# EAGLE board JdDRangeFinderNew-1 (2) (EAGLE 9.6.2)
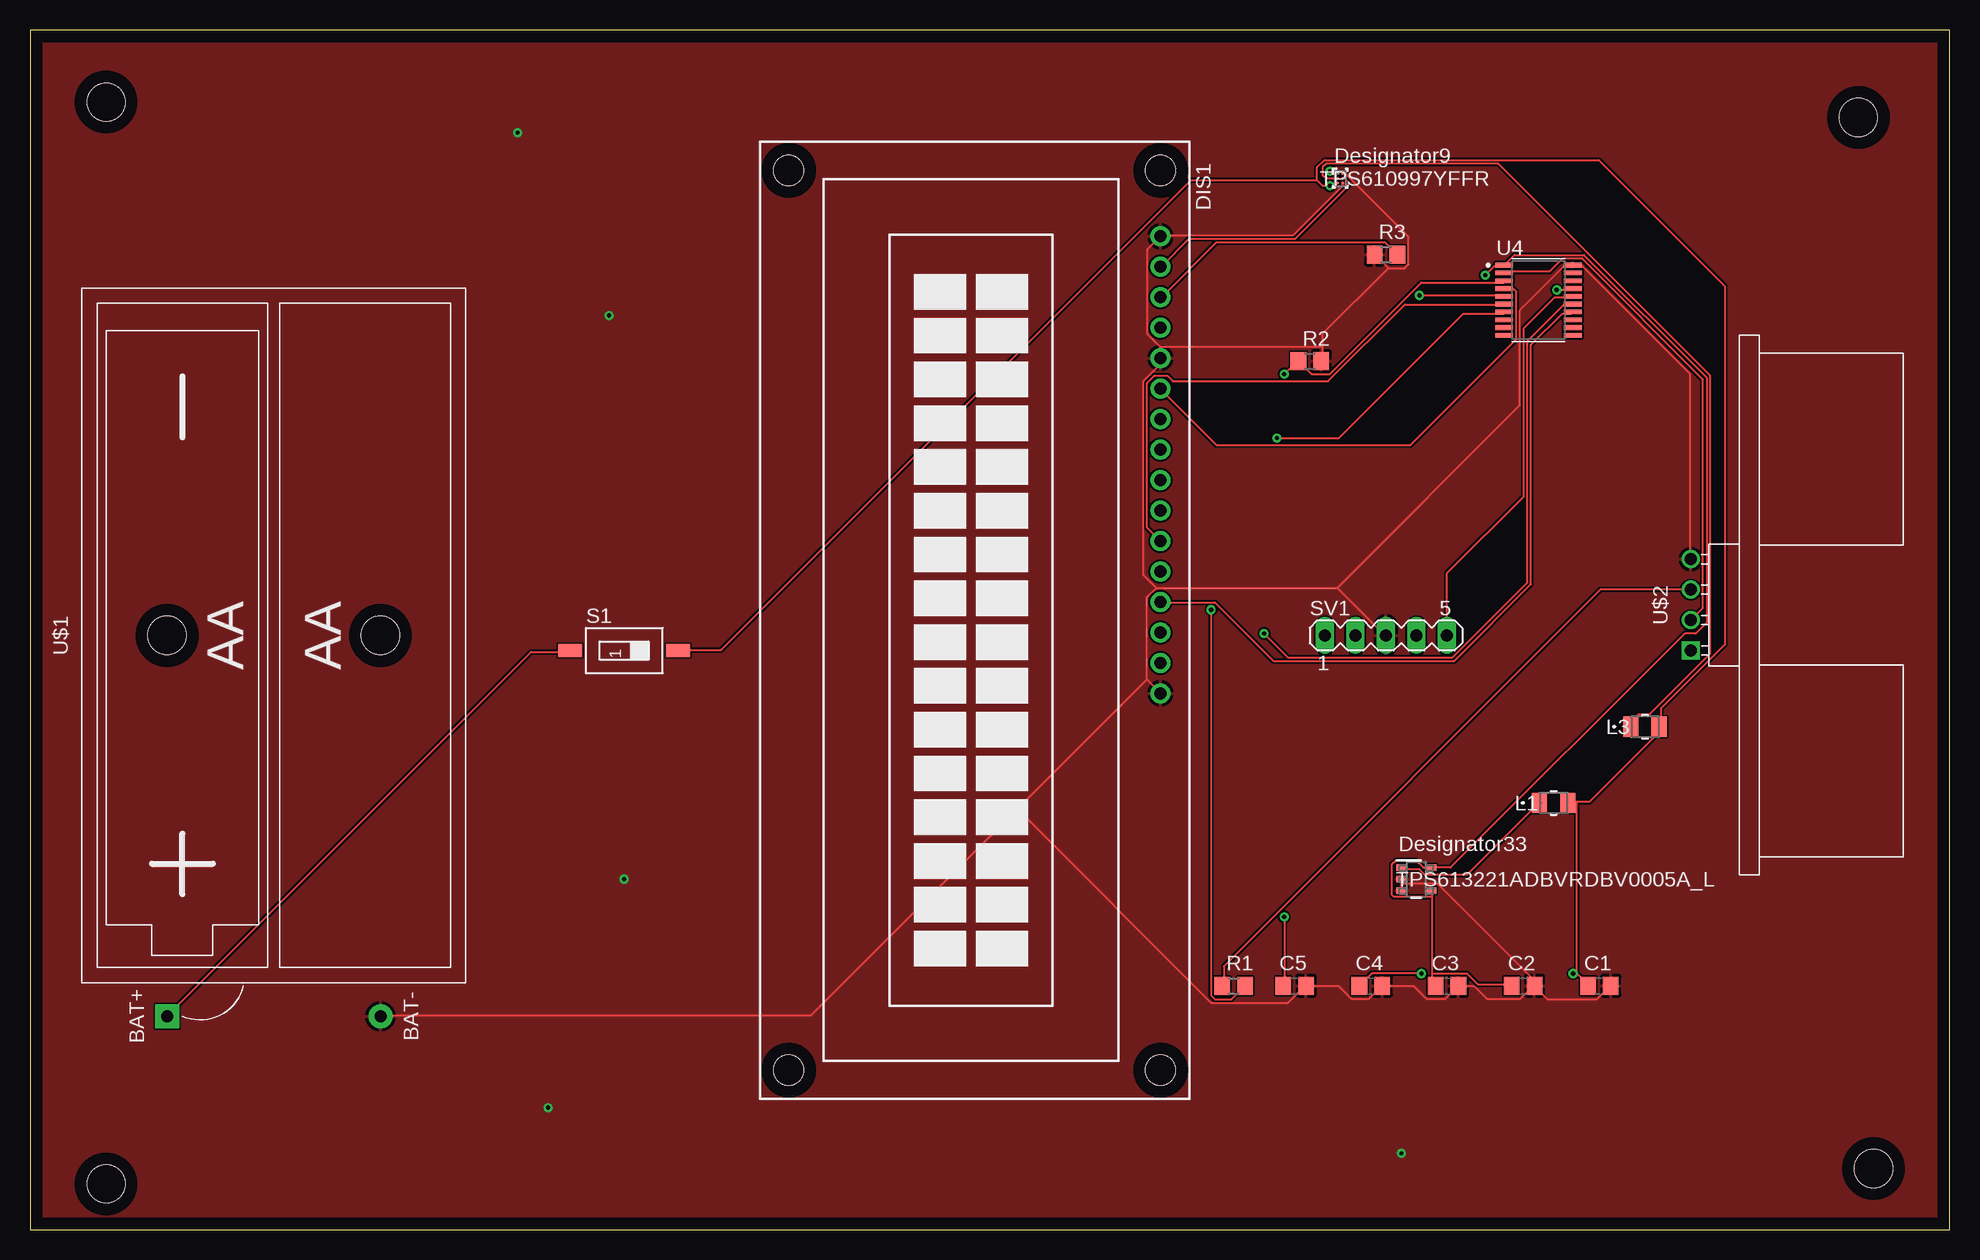
[diagram p0: board, top side]
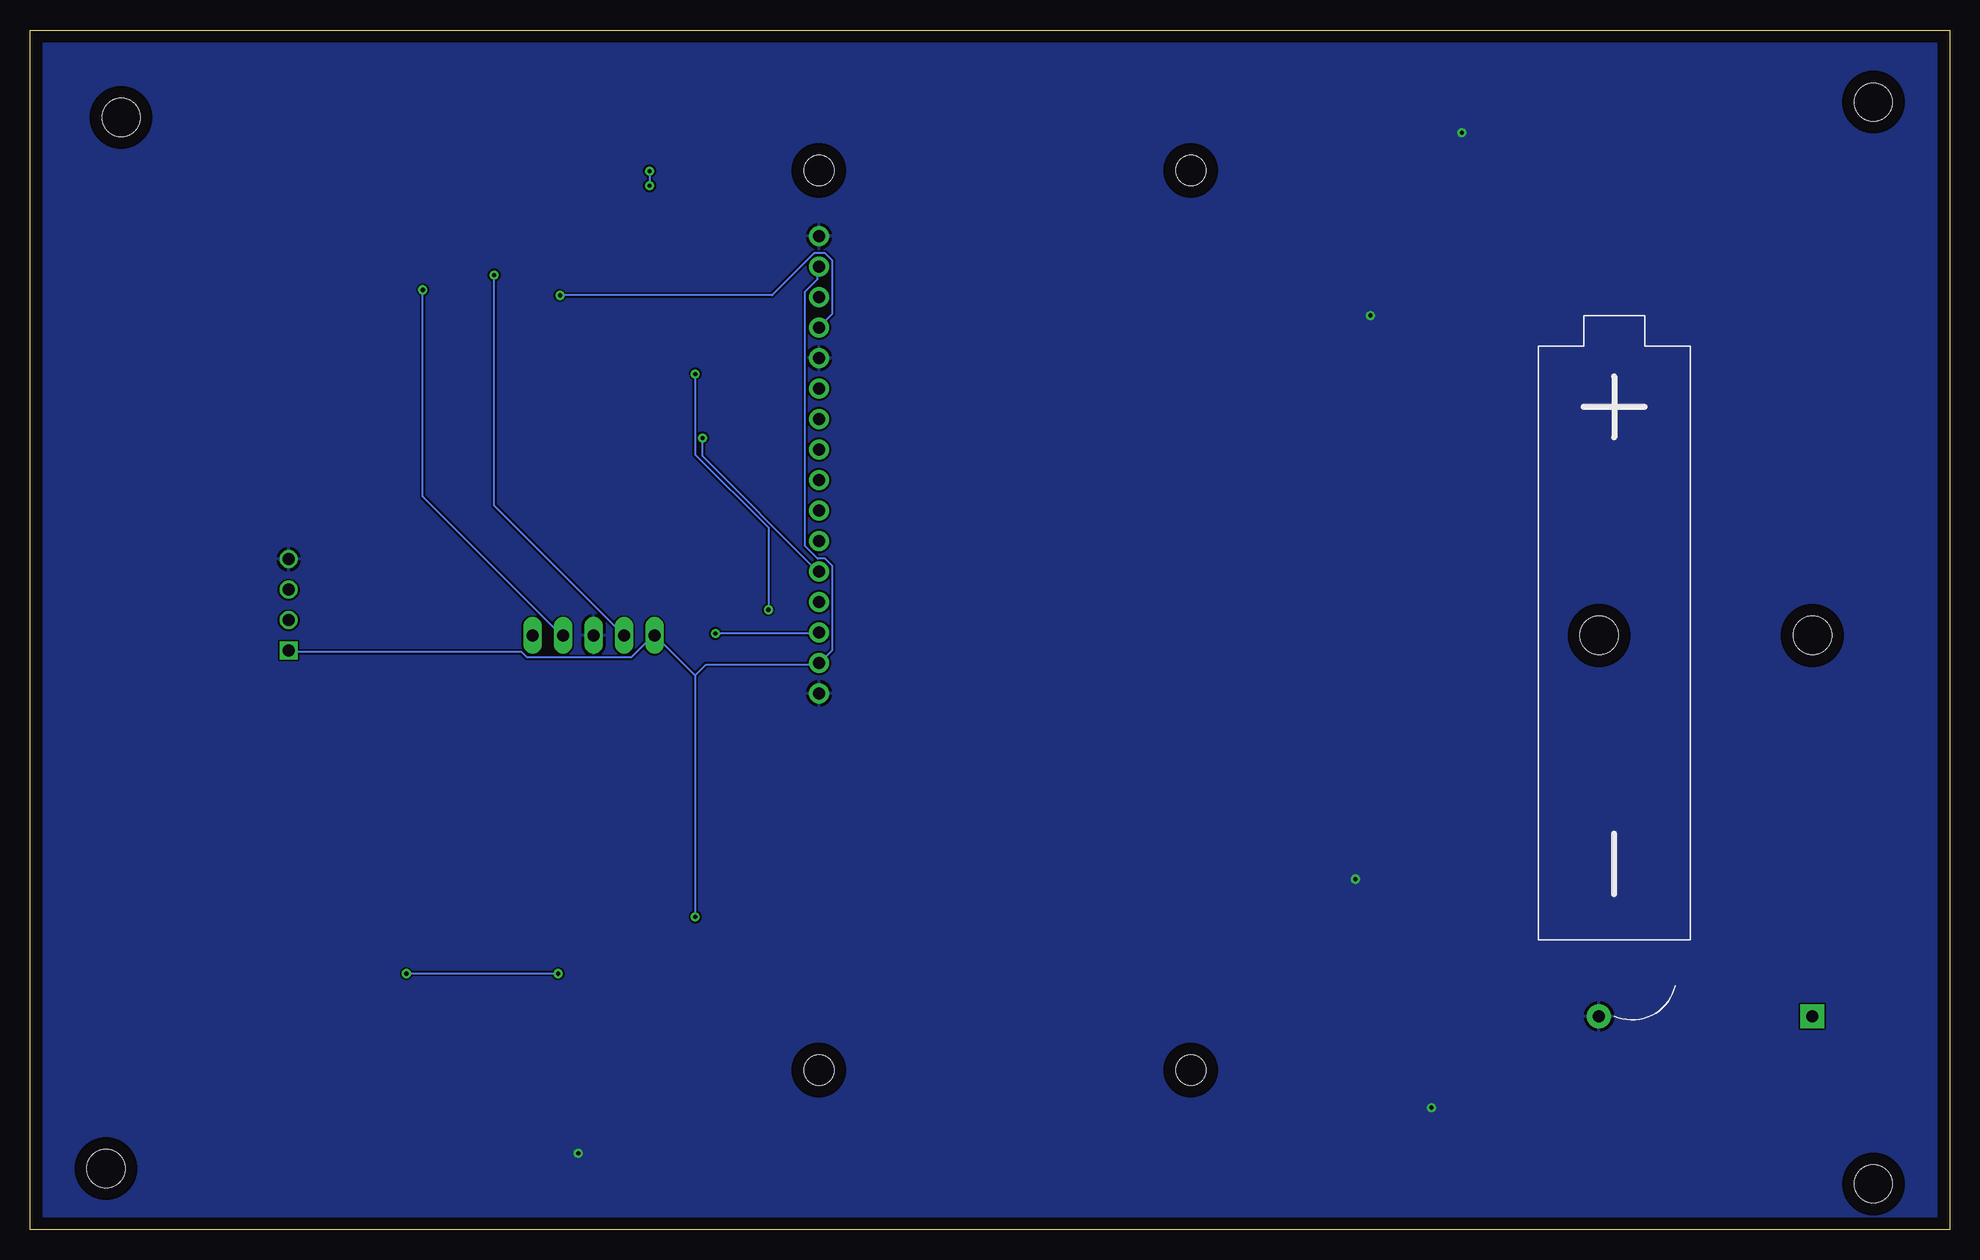
[diagram p1: board, bottom side, seen from below]

Size 160 x 100 mm. Coordinates in mm from the lower left corner, seen from the top.
Outline: 0,0 160,0 160,100 0,100 0,0
Copper layers (1*16): Top 0.035mm / dielectric 1.5mm / Bottom 0.035mm
Design rules "default": minimum track width 6mil, minimum drill 0.35mm, track to track 6mil, track to pad 6mil, pad to pad 6mil, via to via 6mil, smd to smd 6mil, copper to edge 40mil, drill to drill 6mil, minimum pad ring 10mil, minimum via ring 8mil, stop-mask expansion 4mil, vias tented up to drill 0mil, thermal gap 10mil
Holes 3.17 mm at 6.35,93.98 152.4,92.71 153.67,5.08 6.35,3.81

## Footprints (pad centres in the part's own frame; a part is rotated, then mirrored left to right if it is on the bottom)
C0805 = smd 1.3 x 1.5: 1 -0.95,0; 2 0.95,0
TUXGR_16X2_R2 = drill 1 pad 1.676: 1 -32,15.5; 2 -29.46,15.5; 3 -26.92,15.5; 4 -24.38,15.5; 5 -21.84,15.5; 6 -19.3,15.5; 7 -16.76,15.5; 8 -14.22,15.5; 9 -11.68,15.5; 10 -9.14,15.5; 11 -6.6,15.5; 12 -4.06,15.5; 13 -1.52,15.5; 14 1.02,15.5; 15 3.56,15.5; 16 6.1,15.5 | hole 2.5: -37.5,-15.5; 37.5,-15.5; -37.5,15.5; 37.5,15.5
IND_EPCOS_B82498F_EPC = smd 1.257 x 1.702: 1 -1.175,0; 2 1.175,0
R0805 = smd 1.3 x 1.5: 1 -0.95,0; 2 0.95,0
SMS-001 = smd 1.092 x 2.007: 1 0,-4.496; 2 0,4.496
MA05-1 = drill 1.016 long: 1 -5.08,0; 2 -2.54,0; 3 0,0; 4 2.54,0; 5 5.08,0
DBV0005A_L = smd 0.8 x 0.55: 1 -1.275,0.95; 2 -1.275,0; 3 -1.275,-0.95; 4 1.275,-0.95; 5 1.275,0.95
YFF0006AFAD = smd 0.23 x 0.23: A1 -0.2,0.4; A2 0.2,0.4; B1 -0.2,0; B2 0.2,0; C1 -0.2,-0.4; C2 0.2,-0.4
SOP65P640X120-20N = smd 1.57 x 0.41: 1 -2.87,2.925; 2 -2.87,2.275; 3 -2.87,1.625; 4 -2.87,0.975; 5 -2.87,0.325; 6 -2.87,-0.325; 7 -2.87,-0.975; 8 -2.87,-1.625; 9 -2.87,-2.275; 10 -2.87,-2.925; 11 2.87,-2.925; 12 2.87,-2.275; 13 2.87,-1.625; 14 2.87,-0.975; 15 2.87,-0.325; 16 2.87,0.325; 17 2.87,0.975; 18 2.87,1.625; 19 2.87,2.275; 20 2.87,2.925
BATTERY-HOLDER-2AA = drill 1 pad 2 square: BAT+ -31.75,8.89 | drill 1 pad 2: BAT- -31.75,-8.89 | hole 3.2: 0,8.89; 0,-8.89
ULTRASONIC-HC-SR04#V = drill 1 square: 1 -3.81,0 | drill 1: 2 -1.27,0; 3 1.27,0; 4 3.81,0

## Placement (x,y rotation side)
C1  4.7uF  [C0805]  130.81,20.32 0 top
C2  22uF  [C0805]  124.46,20.32 0 top
C3  22uF  [C0805]  118.11,20.32 0 top
C4  10uF  [C0805]  111.76,20.32 0 top
C5  10uF  [C0805]  105.41,20.32 0 top
DIS1  TUXGR_16X2_R2  [TUXGR_16X2_R2]  78.74,50.8 270 top
L1  B82498F1222J000IND_EPCOS_B82498F_EPC  [IND_EPCOS_B82498F_EPC]  127,35.56 0 top
L3  B82498F1222J000IND_EPCOS_B82498F_EPC  [IND_EPCOS_B82498F_EPC]  134.62,41.91 0 top
R1  1K  [R0805]  100.33,20.32 0 top
R2  2K  [R0805]  106.68,72.39 0 top
R3  2K  [R0805]  113.03,81.28 0 top
S1  SWS001  [SMS-001]  49.53,48.26 270 top
SV1  [MA05-1]  113.03,49.53 0 top
U2  TPS613221ADBVRDBV0005A_L  [DBV0005A_L]  115.57,29.21 0 top
U3  TPS610997YFFR  [YFF0006AFAD]  109.22,87.63 0 top
U4  MSP430G2553IPW20R  [SOP65P640X120-20N]  125.73,77.47 0 top
U$1  BATTERY-HOLDER-2AA  [BATTERY-HOLDER-2AA]  20.32,49.53 90 top
U$2  ULTRASONIC-HC-SR04#V  [ULTRASONIC-HC-SR04#V]  138.43,52.07 90 top

## Library data of the parts
C1-C5 = rcl; OC_NEWARK: unknown; SPICEPREFIX: C
DIS1 = display-lcd; OC_FARNELL: unknown; OC_NEWARK: unknown
L1 L3 = B82498F1222J000; AVAILABILITY: In Stock; MF: TDK ELECTRONICS; MP: B82498F1222J000; PACKAGE: None; PRICE: None; PURCHASE-URL: https://pricing.snapeda.com/search/part/B82498F1222J000/?ref=eda
R1-R3 = rcl; OC_NEWARK: unknown; SPICEPREFIX: R
S1 = smd-special; OC_NEWARK: unknown
SV1 = con-lstb; OC_FARNELL: unknown; OC_NEWARK: unknown
U2 = 3.3; COPYRIGHT: Copyright (C) 2022 Ultra Librarian. All rights reserved.; MANUFACTURER_PART_NUMBER: TPS613221ADBVR; MFR_NAME: Texas Instruments; OC_NEWARK: unknown; REFDES: RefDes; TYPE: TYPE
U3 = 5; COPYRIGHT: Copyright (C) 2022 Ultra Librarian. All rights reserved.; MANUFACTURER_PART_NUMBER: TPS610997YFFR; MFR_NAME: Texas Instruments; OC_NEWARK: unknown; REFDES: RefDes; TYPE: TYPE
U4 = MSP430G2553IPW20R; AVAILABILITY: In Stock; DESCRIPTION: 16 MHz MCU with 16KB Flash, 512B SRAM, comparator, UART/SPI/I2C, timer; MF: Texas Instruments; MP: MSP430G2553IPW20R; PACKAGE: TSSOP-20 Texas Instruments; PRICE: None; PURCHASE-URL: https://pricing.snapeda.com/search/part/MSP430G2553IPW20R/?ref=eda
U$1 U$2 = 6 diy-modules; OC_NEWARK: unknown

## Nets
GND: C1.2 C2.2 C3.2 C4.2 C5.2 DIS1.1 DIS1.5 DIS1.16 R2.2 R3.1 SV1.3 U2.2 U2.3 U3.A2 U3.C2 U4.20 U$1.BAT- U$2.4
N$1: SV1.4 U4.17
N$2: C2.1 C3.1 SV1.2 U2.4 U2.5 U4.1
N$3: L3.1 U3.B1
N$4: C5.1 DIS1.2 DIS1.15 SV1.1 U3.B2 U$2.1
N$5: U4.2 U$2.2
N$6: R1.1 U$2.3
N$7: C1.1 C4.1 L1.2 L3.2 S1.2 U3.A1 U3.C1
N$8: L1.1 U2.1
N$10: DIS1.4 U4.5
N$11: DIS1.6 U4.4
N$12: DIS1.11 U4.6
N$13: DIS1.12 U4.7
N$14: DIS1.13 U4.14
N$15: DIS1.14 U4.15
N$16: DIS1.3 R3.2
N$17: S1.1 U$1.BAT+
N$18: SV1.5 U4.16
N$19: R1.2 R2.1 U4.3

## Tracks (layer width: path | path; a pad name or v marks a point on that pad's centre or on a via)
GND  (via drill 0.35)
  Top 0.152: 113.23,80.16 114.61,80.16 114.91,80.47 114.91,82.75 109.58,88.09 109.42,88.09 U3.A2 | 113.23,80.16 112.17,81.23 R3.1 | 107.75,73.61 107.75,74.68 113.23,80.16 | 107.75,73.61 107.75,72.39 R2.2 | U3.C2 109.42,87.17 109.42,87.02 105.31,82.91 94.34,82.91 DIS1.1 94.18,82.75 93.12,81.69 93.12,74.68 94.18,73.61 | 94.18,73.61 94.18,72.69 DIS1.5 94.18,72.54 94.18,72.08 92.81,70.71 92.81,54.56 93.88,53.49 | 94.18,73.61 107.75,73.61 | U$2.4 138.38,55.93 138.38,71.32 129.39,80.31 128.63,80.31 U4.20 128.47,80.31 127.86,80.31 124.21,76.66 124.21,68.73 108.97,53.49 | 114.3,28.8 114.3,29.11 U2.2 | 114.3,28.8 114.3,28.35 U2.3 | 114.3,28.8 117.35,28.8 125.27,20.88 125.27,20.42 C2.2 | C2.2 125.27,20.27 124.21,19.2 121.46,19.2 120.4,20.27 119.18,20.27 C3.2 119.02,20.27 117.96,19.2 116.43,19.2 115.37,20.27 112.78,20.27 C4.2 112.62,20.27 111.56,19.2 110.19,19.2 109.12,20.27 106.38,20.27 C5.2 106.22,20.27 104.85,18.9 98.45,18.9 82.3,35.05 | C1.2 131.67,20.27 130.61,19.2 126.49,19.2 125.42,20.27 C2.2 | 108.97,53.49 112.93,49.53 SV1.3 | 93.88,53.49 108.97,53.49 | 93.88,53.49 93.12,52.73 93.12,45.87 | 93.12,45.87 94.18,44.81 DIS1.16 | 93.12,45.87 82.3,35.05 | 82.3,35.05 65.08,17.83 29.26,17.83 U$1.BAT-
  other vias: 40.64,91.44 49.53,29.21 48.26,76.2 43.18,10.16 114.3,6.35
  pour Top: -5.08,102.87 163.83,102.87 165.1,101.6 165.1,-2.54 163.83,-3.81 161.29,-6.35 -8.89,-6.35 -10.16,-5.08 -10.16,97.79
  pour Bottom: -7.62,104.14 -7.62,-5.08 166.37,-5.08 167.64,-3.81 167.64,102.87 165.1,105.41 -6.35,105.41
N$1  (via drill 0.35)
  Top 0.152: v127.25,78.33 128.47,78.33 U4.17
  Bottom 0.152: v127.25,78.33 127.25,61.11 115.67,49.53 SV1.4
N$2  (via drill 0.35)
  Top 0.152: 116.89,21.34 116.89,20.57 117.04,20.42 C3.1 | 116.89,21.34 116.89,27.74 | 116.89,27.74 116.89,28.19 U2.4 | 116.89,27.74 113.69,27.74 113.54,27.89 113.54,30.48 113.84,30.79 115.52,30.79 116.13,30.18 116.74,30.18 U2.5 116.89,30.18 118.42,30.18 137.92,49.68 138.84,49.68 139.75,50.6 139.75,71.02 129.54,81.23 123.75,81.23 122.99,80.47 U4.1 122.83,80.31 122.07,80.31 v121.31,79.55 | 116.89,21.34 119.79,21.34 120.7,20.42 123.44,20.42 C2.1
  Bottom 0.152: v121.31,79.55 121.31,60.35 SV1.2
N$3
  Top 0.152: U3.B1 108.97,87.63 108.05,87.63 107.75,87.94 107.75,88.54 108.05,88.85 122.38,88.85 140.06,71.17 140.06,48.01 135.03,42.98 134.11,42.98 133.5,42.37 133.5,41.91 L3.1
N$4  (via drill 0.35)
  Top 0.152: U3.B2 109.58,87.63 109.88,87.33 109.88,87.02 105.46,82.6 96.62,82.6 94.34,80.31 DIS1.2 | v104.55,26.06 104.55,20.42 C5.1
  Bottom 0.152: 104.55,46.18 v104.55,26.06 | 104.55,46.18 107.9,49.53 SV1.1 108.05,49.53 109.88,47.7 118.57,47.7 119.02,48.16 138.38,48.16 U$2.1 | 104.55,46.18 103.63,47.09 94.34,47.09 DIS1.15 94.18,47.24 93.12,48.31 93.12,55.32 93.73,55.93 94.34,55.93 95.4,57 95.4,78.18 94.34,79.25 94.34,80.16 DIS1.2
N$5
  Top 0.152: U$2.2 139.45,51.82 139.45,70.87 129.39,80.92 127.71,80.92 126.64,79.86 122.99,79.86 U4.2
N$6
  Top 0.152: U$2.3 130.91,53.34 99.52,21.95 99.52,20.42 R1.1
N$7  (via drill 0.35)
  Top 0.152: 128.93,35.66 130,35.66 135.79,41.45 L3.2 135.94,41.91 135.94,43.43 141.28,48.77 141.28,78.64 130.76,89.15 107.9,89.15 107.29,88.54 107.29,87.48 | 128.93,35.66 128.32,35.66 L1.2 | v115.98,21.34 111.86,21.34 110.95,20.42 C4.1 | 128.93,21.34 129.84,20.42 C1.1 | 128.93,21.34 128.93,35.66 | 128.93,21.34 v128.63,21.34 | v108.36,88.24 108.81,88.24 108.97,88.09 U3.A1 | U3.C1 108.97,87.17 108.51,87.17 v108.36,87.02 107.75,87.02 107.29,87.48 | 107.29,87.48 96.77,87.48 57.61,48.31 54.1,48.31 S1.2
  Bottom 0.152: v128.63,21.34 v115.98,21.34 | v108.36,88.24 v108.36,87.02
N$8
  Top 0.152: U2.1 114.3,30.02 115.82,30.02 116.28,29.57 119.79,29.57 125.73,35.51 L1.1
N$10  (via drill 0.35)
  Top 0.152: v115.82,77.88 122.83,77.88 U4.5
  Bottom 0.152: v115.82,77.88 98.15,77.88 94.64,81.38 93.73,81.38 93.12,80.77 93.12,76.35 94.18,75.29 DIS1.4
N$11
  Top 0.152: U4.4 122.99,78.33 123.75,78.33 123.9,78.18 123.9,74.22 115.06,65.38 98.91,65.38 94.34,69.95 DIS1.6
N$12
  Top 0.152: U4.6 122.83,77.11 114.61,77.11 108.2,70.71 95.25,70.71 94.79,71.17 93.73,71.17 93.12,70.56 93.12,58.52 94.18,57.45 DIS1.11
N$13  (via drill 0.35)
  Top 0.152: v103.94,65.99 109.12,65.99 119.48,76.35 122.83,76.35 U4.7
  Bottom 0.152: v103.94,65.99 103.94,64.47 94.34,54.86 DIS1.12
N$14
  Top 0.152: U4.14 128.47,76.35 127.71,76.35 125.12,73.76 125.12,53.8 118.72,47.4 103.63,47.4 98.75,52.27 94.34,52.27 DIS1.13
N$15  (via drill 0.35)
  Top 0.152: v102.87,49.68 104.85,47.7 118.57,47.7 124.82,53.95 124.82,74.07 127.86,77.11 128.47,77.11 U4.15
  Bottom 0.152: v102.87,49.68 94.34,49.68 DIS1.14
N$16
  Top 0.152: R3.2 113.84,81.38 112.93,82.3 98.91,82.3 94.34,77.72 DIS1.3
N$17
  Top 0.152: S1.1 44.96,48.16 41.76,48.16 11.43,17.83 U$1.BAT+
N$18
  Top 0.152: SV1.5 118.11,54.71 124.51,61.11 124.51,75.13 127.1,77.72 128.47,77.72 U4.16
N$19  (via drill 0.35)
  Top 0.152: v98.45,51.66 98.45,19.51 98.75,19.2 100.13,19.2 101.19,20.27 R1.2 | v104.55,71.32 105.61,72.39 R2.1 105.77,72.39 106.83,71.32 108.36,71.32 115.98,78.94 122.83,78.94 U4.3
  Bottom 0.152: v98.45,51.66 98.45,58.52 104.55,64.62 v104.55,71.32